# Altium PCB PCB1.PcbDoc
Units mil, origin at the board's own origin, x right, y up, seen from the top; angles counter-clockwise.
Board outline 1700 x 740 mil, 2 copper layers (Top Layer, Bottom Layer); 23 components, 43 nets, 151 pads, 22 vias.
Unrouted connection lines stored in the file: 26.
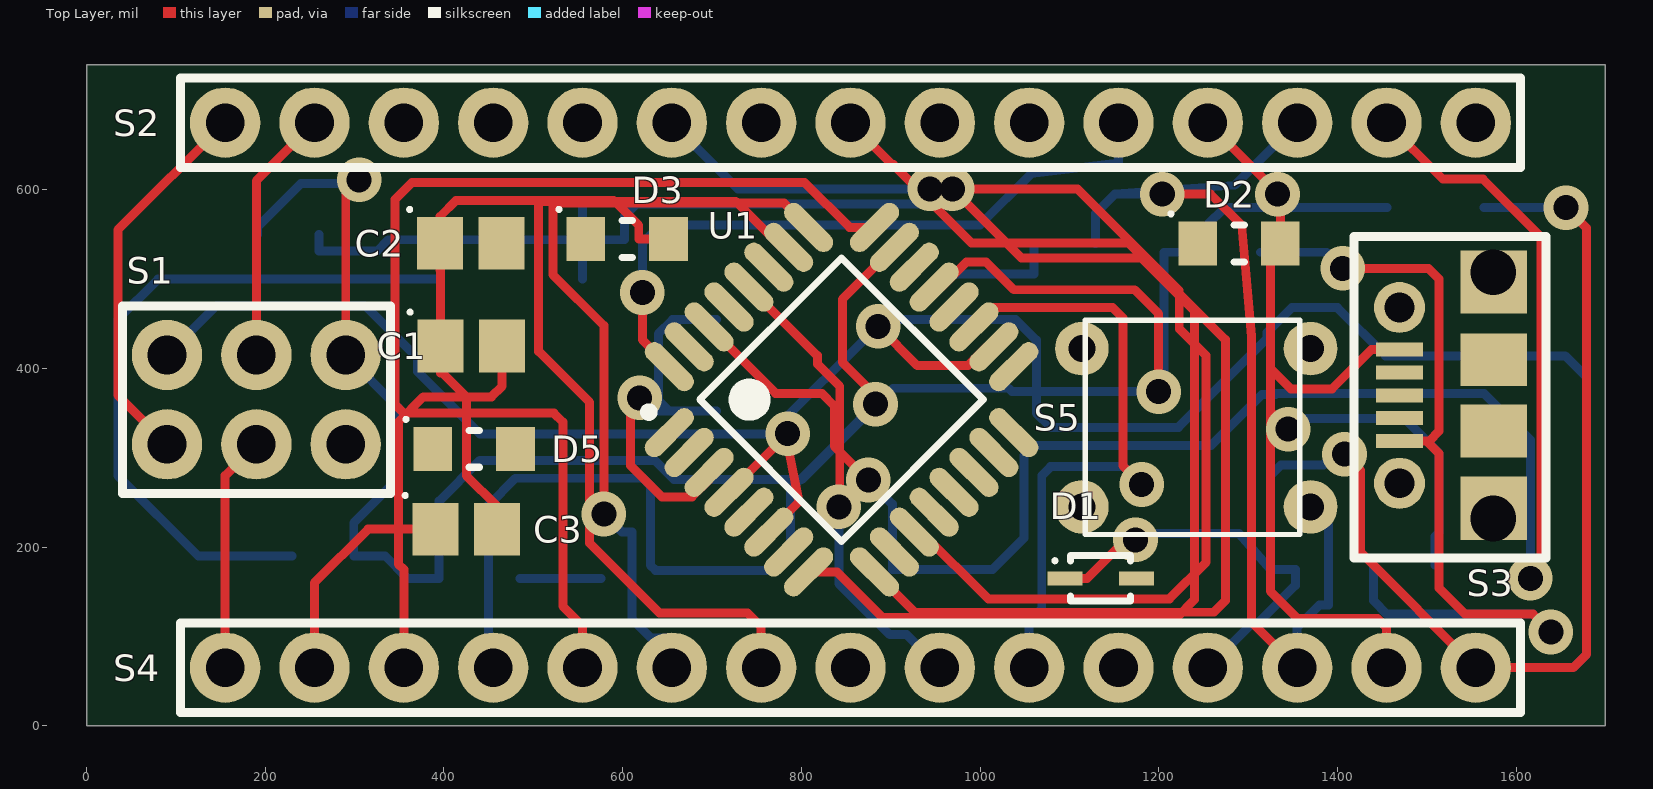
[diagram p0: Top Layer view]
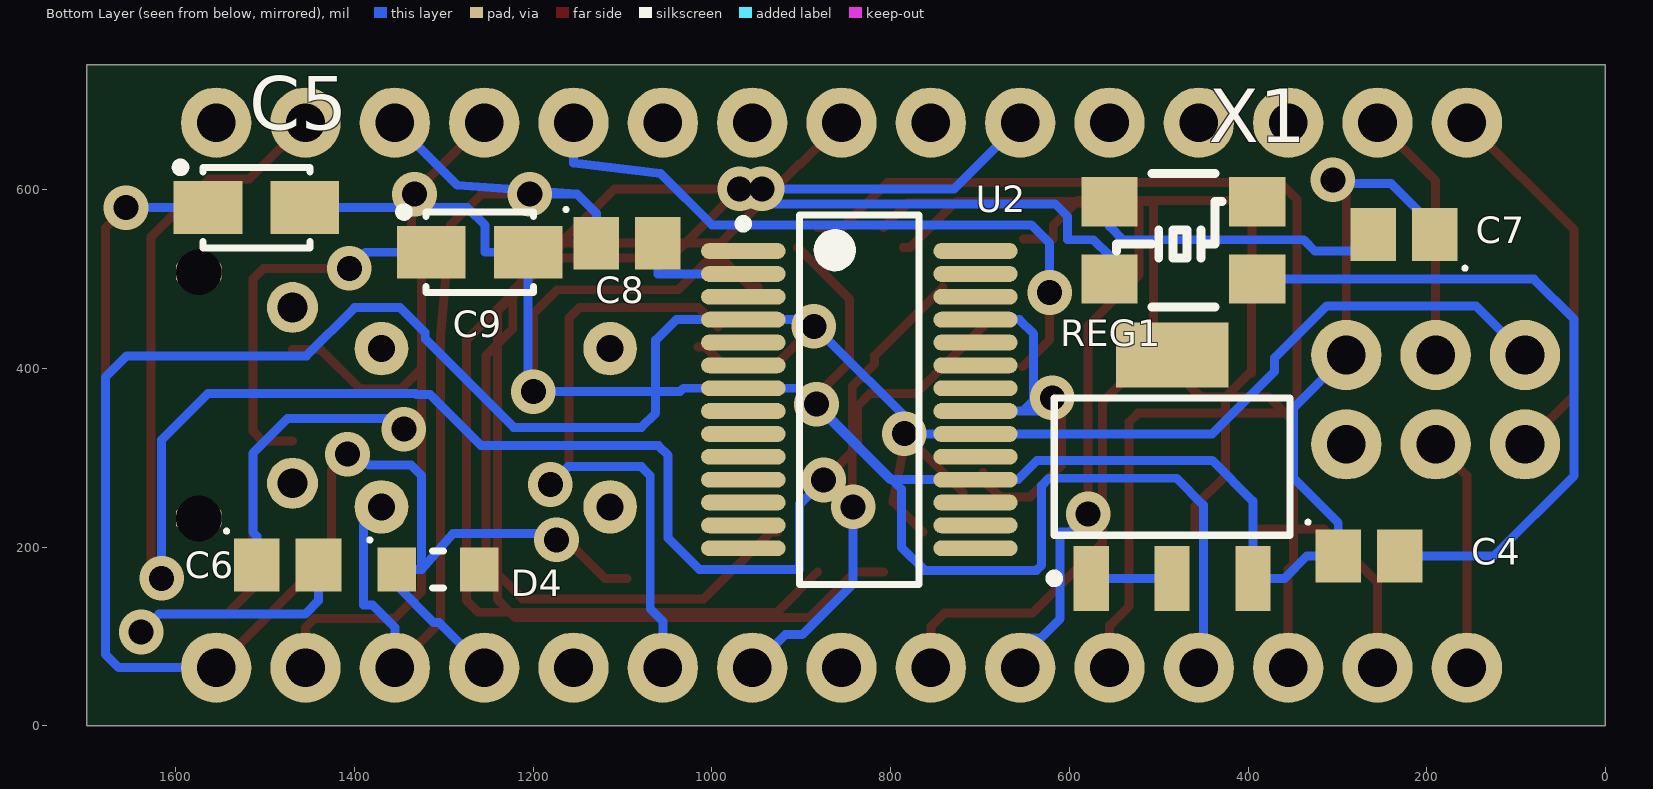
[diagram p1: Bottom Layer view, seen from below]

## Layer stack, top to bottom
Top Solder: solder mask 0.4, Solder Resist, Dk 3.5
Top Layer: signal copper 1.4
Dielectric 1: dielectric 12.6, FR-4, Dk 4.8
Bottom Layer: signal copper 1.4
Bottom Solder: solder mask 0.4, Solder Resist, Dk 3.5

## Board outline
0,0 0,740 1700,740 1700,0

## Design rules (kind name [scope] priority, off if disabled: settings)
Clearance [All] p1: gap=10 ignorepadtopadclearanceinfootprint=FALSE
PolygonConnect [All] p1: connectstyle=Relief reliefconductorwidth=10 reliefentries=4 polygonreliefangle="90 Angle" airgapwidth=10
RoutingVias [All] p1: holewidth=28 width=50 viastyle="Through Hole" minholewidth=28 minwidth=50 maxholewidth=28 maxwidth=50
SolderMaskExpansion [All] p1: expansion=4 istentingtop=FALSE
SupplyNets "Schematic Supply Nets_3" [InNet('VUSB')] p1: voltage=0.000
SupplyNets "Schematic Supply Nets_2" [InNet('AVCC')] p2: voltage=0.000
SupplyNets "Schematic Supply Nets_1" [InNet('3V')] p3: voltage=0.000
SupplyNets "Schematic Supply Nets" [InNet('GND')] p4: voltage=0.000
Width [All] p1: maxlimit=10 minlimit=10 preferedwidth=10
30 further rules are at their usual default settings.

## Components (designator, comment, footprint, x,y, rotation, side; value= is the part's Value field where it differs from the comment)
C1 "100nF Ceramic Multilayer Capacitor_1" CAPCP2012X09N 430.55,425 r0 top
C2 "100nF Ceramic Multilayer Capacitor_1" CAPCP2012X09N 430,540 r0 top
C3 "100nF Ceramic Multilayer Capacitor_1" CAPCP2012X09N 425,220 r0 top
C4 "C0805C180J5GACTU" CAPCP2012X09N 264.52,190 r180 bottom
C5 "Capacitor SMT Tantalum" "CASE A - 3216X18" 1510,580 r180 bottom value=4.7µF
C6 "100nF Ceramic Multilayer Capacitor_1" CAPCP2012X09N 1475,180 r180 bottom
C7 "C0805C180J5GACTU" CAPCP2012X09N 225.48,550 r0 bottom
C8 "100nF Ceramic Multilayer Capacitor_1" CAPCP2012X09N 1095.07,540 r180 bottom
C9 "Capacitor SMT Tantalum" "CASE A - 3216X18" 1260,530 r180 bottom value=4.7µF
D1 "Panasonic DB2J20900L Schottky Diode, 0.5A, 20V, 2.4ns, 2-Pin SMini2 F5 B" DIOM1712X07N 1135,165 r0 top
D2 "Kingbright Red LED, 100 mcd 120 ° 0805" LED1913X12NRED 1290,540 r0 top
D3 "Kingbright Blue LED, 60 mcd 120 ° 0805" LED1913X12NBLUE 605,545 r0 top
D4 "Kingbright Green LED, 70 mcd 120 ° 0805" LED1913X12NGREEN 1306.71,175 r180 bottom
D5 "Kingbright Red LED, 100 mcd 120 ° 0805" LED1913X12NRED 433.74,310 r0 top
REG1 "LM1117MP-5.0/NOPB, Low Dropout Voltage Regulator, 1.5A, 5 V ±1%, 4-Pin SOT-223" SOT230P700X180-4N 485,290 r90 bottom
S1 "Programming Headers Dual Row" "ISP HEADER" -605,870 r0 top
S2 "connector;str header;single row;.1 cont centers;.095 tail;gold or gtx;36 contact" Header 1555,675 r180 top
S3 "NewMolex Right Angle SMT Female Type B Micro USB Connector, 30 V ac, 1.8A" MicroUSB 1469.57,321.42 r90 top
S4 "connector;str header;single row;.1 cont centers;.095 tail;gold or gtx;36 contact" Header 1555,65 r180 top
S5 "Tactile Switch SPST- NO 0.05A @24V" "Tactile Switch" 1370,245 r0 top
U1 "ATMEGA328P-AU" TQFP80P900X900X120-32N 845,365 r45 top
U2 "FT232RL, Universal Asynchronous Receiver & Transmitter 3MBd, 28-Pin, SSOP" SOP65P780X200-28N 835,365 r180 bottom
X1 "Aker 16MHz Crystal SMT" "Aker S5C Crystal" 389.65,586.61 r180 bottom value=16MHz

## Footprints (in the part's own frame and the unit in brackets; to place one, negate y for a bottom-side part, rotate by r counter-clockwise, add the part's x,y. Pads: shape width x height; smd on the part's side, far side on the other; paste and mask are expansions set on the pad)
"Aker S5C Crystal" [mm]
  rect 1.6x1.4 smd: 1(0,0) 2(-4.2,0) 3(0,-2.2) 4(-4.2,-2.2)
  round 0.254 on Bottom Overlay: 5(-3,-2.4)
  silkscreen extent -4,-3 -1,0.8, body extent -4.7,-2.8 0.5,0.6, height 1
CAPCP2012X09N [mm] "Chip Capacitor, 2-Leads, Body 2.00x1.25mm, IPC Medium Density"
  rect 1.3x1.5 smd: 1(-0.875,0) 2(0.875,0)
  silkscreen extent -1.79,0.91 -1.69,1.01, body extent -1.05,-0.57 0.95,0.68, height 0.78
"CASE A - 3216X18" [mm] "Molded Capacitor, 2-Leads, Body 3.2x1.6mm, IPC Medium Density"
  rect 1.95x1.5 smd: 1(-1.375,0) 2(1.375,0)
  silkscreen extent -2.28,-1.14 1.52,1.27, body extent -1.52,-0.76 1.65,0.84, height 1.77
DIOM1712X07N [mm] "Molded Diode, 2-Leads, Body 1.70x1.25mm, IPC Medium Density"
  rect 1x0.4 smd: 1(-1.016,0) 2(1.016,0)
  silkscreen extent -1.35,-0.65 0.85,0.65, body extent -0.9,-0.45 0.9,0.45, height 0.8
Header [mm] "SIL Header"
  round 2 hole 1.1: 1(0,0) 2(2.54,0) 3(5.08,0) 4(7.62,0) 5(10.16,0) 6(12.7,0) 7(15.24,0) 8(17.78,0) 9(20.32,0) 10(22.86,0) 11(25.4,0) 12(27.94,0) 13(30.48,0) 14(33.02,0) 15(35.56,0)
  silkscreen extent -1.27,-1.27 36.83,1.27, body extent -1.33,-1.35 36.93,1.35, height 8.6
"ISP HEADER" [mm] "SIL Header for programming"
  round 2 hole 1.1: 1(17.653,-14.097) 2(17.653,-11.557) 3(20.193,-14.097) 4(20.193,-11.557) 5(22.733,-14.097) 6(22.733,-11.557)
  silkscreen extent 16.38,-15.49 24,-10.16, body extent 16.38,-15.37 24,-10.29, height 8
LED1913X12NBLUE [mm] "LED 2-Leads, Body 1.90x1.32mm, IPC Medium Density"
  rect 1.1x1.25 smd: 1(-1.175,0) 2(1.175,0)
  silkscreen extent -1.99,-0.53 0.15,0.89, body extent -1,-0.62 1.02,0.62, height 1.1
LED1913X12NGREEN [mm] "LED 2-Leads, Body 1.90x1.32mm, IPC Medium Density"
  rect 1.1x1.25 smd: 1(-1.175,0) 2(1.175,0)
  silkscreen extent -1.99,-0.53 0.15,0.89, body extent -1.01,-0.62 1.01,0.63, height 1.1
LED1913X12NRED [mm] "LED 2-Leads, Body 1.90x1.32mm, IPC Medium Density"
  rect 1.1x1.25 smd: 1(-1.175,0) 2(1.175,0)
  silkscreen extent -1.99,-0.53 0.15,0.89, body extent -1.02,-0.43 1.04,0.47, height 0.85
MicroUSB [mm] "MicroUSB  Molex 5Pin"
  rect 0.4x1.35 smd: 1(-0.07,0) 2(0.58,0) 3(1.23,0) 4(1.88,0) 5(2.53,0)
  rrect50% 0.6x1.3 hole 1.3: ""(-2.27,-2.667) ""(-2.27,-2.667) ""(4.73,-2.667)
  rect 1.8x1.9 smd: ""(-1.98,-2.678) ""(4.45,-2.678)
  round 1.45 hole 0.85: ""(-1.27,0) ""(3.73,0)
  rect 1.5x1.9 smd: ""(0.218,-2.678) ""(2.242,-2.678)
  silkscreen extent -3.39,-4.17 5.75,1.3, body extent -2.83,-5.32 5.37,0.11, height 2.68
SOP65P780X200-28N [mm] "SOP, 28-Leads, Body 10.20x5.30mm, Pitch 0.65mm, IPC Medium Density"
  oval 2.4x0.45 smd: 1(-3.3,4.225) 2(-3.3,3.575) 3(-3.3,2.925) 4(-3.3,2.275) 5(-3.3,1.625) 6(-3.3,0.975) 7(-3.3,0.325) 8(-3.3,-0.325) 9(-3.3,-0.975) 10(-3.3,-1.625) 11(-3.3,-2.275) 12(-3.3,-2.925) 13(-3.3,-3.575) 14(-3.3,-4.225) 15(3.3,-4.225) 16(3.3,-3.575) 17(3.3,-2.925) 18(3.3,-2.275) 19(3.3,-1.625) 20(3.3,-0.975) 21(3.3,-0.325) 22(3.3,0.325) 23(3.3,0.975) 24(3.3,1.625) 25(3.3,2.275) 26(3.3,2.925) 27(3.3,3.575) 28(3.3,4.225)
  silkscreen extent -3.43,-5.25 1.7,5.25, body extent -3.91,-5.1 3.91,5.1, height 2
SOT230P700X180-4N [mm] "SOT223, 4-Leads, Body 6.50x7.00mm (avg), Pitch 2.30mm, IPC Medium Density"
  rect 1.85x1 smd: 1(-3.175,2.3) 2(-3.175,0) 3(-3.175,-2.3)
  rect 1.85x3.2 smd: 4(3.175,0)
  silkscreen extent -3.3,-3.35 1.95,3.48, body extent -3.8,-3.12 3.29,3.38, height 1.65
"Tactile Switch" [mil]
  round 60 hole 30: 1(0,0) 2(-255.91,0) 3(0,177.17) 4(-255.91,177.17)
  silkscreen extent -252,-31 -12,209, body extent -277,-29 27,209, height 197
TQFP80P900X900X120-32N [mm] "TQFP, 32-Leads, Body 7.00x7.00mm, Pitch 0.80mm, IPC Medium Density"
  oval 1.75x0.55 smd: 1(-4.125,2.8) 2(-4.125,2) 3(-4.125,1.2) 4(-4.125,0.4) 5(-4.125,-0.4) 6(-4.125,-1.2) 7(-4.125,-2) 8(-4.125,-2.8) 17(4.125,-2.8) 18(4.125,-2) 19(4.125,-1.2) 20(4.125,-0.4) 21(4.125,0.4) 22(4.125,1.2) 23(4.125,2) 24(4.125,2.8)
  oval 0.55x1.75 smd: 9(-2.8,-4.125) 10(-2,-4.125) 11(-1.2,-4.125) 12(-0.4,-4.125) 13(0.4,-4.125) 14(1.2,-4.125) 15(2,-4.125) 16(2.8,-4.125) 25(2.8,4.125) 26(2,4.125) 27(1.2,4.125) 28(0.4,4.125) 29(-0.4,4.125) 30(-1.2,4.125) 31(-2,4.125) 32(-2.8,4.125)
  silkscreen extent -4.25,-2.85 2.85,3.75, body extent -4.44,-4.5 4.56,4.5, height 1.6

## Part data
C1 C2 C3 C6 C8: "AVX 0805 Standard 100nF Ceramic Multilayer Capacitor, 50 V dc X7R Dielectric ±10% SMD", Capacitance=100nF, Manufacturer=AVX, Package=0805, Voltage=50V, Creator="Ritesh Kanjee", Datasheet URL=http://za.rs-online.com/web/p/ceramic-multilayer-capacitors/4646688/, Date Created="18 February 2015", RS Stock No.=464-6688
C4 C7: library part "18pF Ceramic Multilayer Capacitor, 50 V dc C0G Dielectric ±5% SMD", "18pF Ceramic Multilayer Capacitor, 50 V dc C0G Dielectric ±5% SMD", Capacitance=18pF, Manufacturer=Kemet, Package=0805, Voltage=50V, Creator="Ritesh Kanjee", Datasheet URL=http://za.rs-online.com/web/p/ceramic-multilayer-capacitors/6480935/?searchTerm=C0805C180J5GACTU&relevancy-data=636F3D3226696E3D4931384E4B6E6F776E41734D504E266C753D656E266D6D3D6D61746368616C6C7061727469616C26706D3D5E5B5C707B4C7D5C707B4E647D2D2C2F255C2E5D2B2426706F3D313326736E3D592673743D4D414E5F504152545F4E554D4245522677633D424F5448267573743D4330383035433138304A35474143545526, Date Created="18 February 2015", RS Stock No.=648-0935
C5 C9: library part "4.7µF Tant RS 496-3545", "Capacitor,tantalum,SMT,16V,4.7uF,10%,A-case", Package=3216-18, Tolerance=10%, Voltage=16V, ComponentLink1Description="Supplier Website", ComponentLink1URL=http://za.rs-online.com/web/search/searchBrowseAction.html?method=getProduct&R=4963545, ComponentLink2Description="RS Data sheet", ComponentLink2URL=http://docs-europe.origin.electrocomponents.com/webdocs/04ed/0900766b804ed4cc.pdf, LatestRevisionDate=28-April-2010, Part Originator="H Theron", Publisher=DPSS, RS Stock Nr.=496-3545
D1: library part "Schottky Diode, 0.5A, 20V, 2.4ns, 2-Pin SMini2 F5 B", Manufacturer=Panasonic, Manufacturer Part No.=DB2J20900L, Maximum Continuous Forward Current=0.5A, Peak Reverse Repetitive Voltage=20V, Created By="R Kanjee", Datasheet=http://docs-europe.electrocomponents.com/webdocs/1398/0900766b813986b3.pdf, Date Created="1 March 2015", RS Stock No.=713-2703
D2 D5: Color=RED, Forward Voltage=1.85V, Manufacturer=KingBright, Manufacturer Part No.=KP-2012SRC-PRV, Creator="Ritesh Kanjee", Datasheet URL=http://za.rs-online.com/web/p/visible-leds/4663813/, Date Created="18 February 2015", RS Stock No.=466-3813
D3: Color=Blue, Forward Voltage=3.2V, Manufacturer=KingBright, Manufacturer Part No.=KP-2012PBC-A, Creator="Ritesh Kanjee", Datasheet URL=http://za.rs-online.com/web/p/visible-leds/4663784/, Date Created="18 February 2015", RS Stock No.=466-3784
D4: Color=Green, Forward Voltage="2.1 V", Manufacturer=KingBright, Manufacturer Part No.=KP-2012MGC, Creator="Ritesh Kanjee", Datasheet URL=http://za.rs-online.com/web/p/visible-leds/4663778/, Date Created="18 February 2015", RS Stock No.=466-3778
REG1: library part LM1117MP-5.0, Manufacturer="Texas Instruments", Maximum Input Voltage=15V, Output Voltage=5V, Supply Current=1.5Amps, Created By="R Kanjee", Datasheet URL=http://za.rs-online.com/web/p/low-dropout-voltage-regulators/5339583/, Date Created="26 February 2015", RS Stock No.=533-9583
S1: library part "Programming ISP, Programming Headers Dual Row", Current Rating="3Amps Continuous", Manufacturer=FCI, Manufacturer Part No.=68000-236HLF, Created By="R Kanjee", Date Created="1 March 2015", RS Stock No.=2509565626
S2 S4: library part "Single row; PCB headers", Current Rating="3Amps Continuous", Manufacturer=FCI, Manufacturer Part No.=68000-236HLF, Created By="R Kanjee", Date Created="1 March 2015", RS Stock No.=2509565626
S3: library part "Micro USB Connector, 30 V ac, 1.8A", Manufacturer=Molex, Manufacturer Part No.=105017-0001, Max Current=1.8A, Max Voltage=30V, Creator="R Kanjee", Datasheet URL=http://za.rs-online.com/web/p/micro-usb-connectors/8486764/, Date Created="28 February 2015", RS Stock No=848-6764
S5: Manufacturer=Omron, Manufacturer Part No.=B3F1000, Creator="R Kanjee", Date Created="25 February 2015", RS Stock No.=686-6847, State="Normaly Open"
U1: "ATMEGA328P-AU, 8 bit AVR Microcontroller 20MHz 1 kB, 32 kB Flash, 2 kB RAM, I2C 32-Pin TQFP", Company="Lumina Inova", Created By="Ritesh Kanjee", Datasheet URL=http://docs-europe.electrocomponents.com/webdocs/0db4/0900766b80db4deb.pdf, Date Created="14 February 2015", RS Stock No.=696-3092
U2: library part "FT232RL USB to UART, Universal Asynchronous Receiver & Transmitter 3MBd, 28-Pin, SSOP", Manufacturer="FTDI Chip", Manufacturer Part No.=FT232RL, Creator="R Kanjee", Date Created="03 March 2015", Pin Count=28, RS Stock No.=406-580
X1: library part "Aker  C5S-16.000-12-3030-X", "Aker S5C SMT Crystal", Frequency Stability=+/-30ppm, Load Capacitance=12pF, Manufacturer=Aker, Manufacturer Part #=C5S-16.000-12-3030-X, Package="3.2x5mm SMD", Creator="R Kanjee", HelpURL=http://za.rs-online.com/web/p/crystal-units/6719488/, RS="RS 671-9488", RS Stock Nr.=671-9488, Supplier=RS

## Via types
v1: diameter 50, hole 28, Top Layer to Bottom Layer, 22 vias

## Nets (pads, with @x,y where several pads share a name; then routed paths per layer and width w, separated by ;. In a path a pad name is that pad's centre, name@x,y a point inside that pad or via, vN(x,y) a via of type N, cw(c..) or ccw(c..) an arc to the next point about the centre after c; other vN are vias at no path point)
3V: C3.1 S4.14 U2.17 | length 255.4
  Top Layer w10: S4.14 255,160 315,220 C3.1
A0: S4.12 U1.23 | length 1054.3
  Top Layer w10: v1(883,360) 883,370 846,407 846,477.35 U1.23
  Bottom Layer w10: S4.12 450,70 450,247 480,277 622.83,277 631,268.83 631,179.86 636.86,174 762,174 788,200 788,265 v1(883,360)
A1: S4.11 U1.24 | length 1275
  Top Layer w10: S4.11 555,112 533,134 533,340 523,350 355,350 345,360 345,589 364,608 803.78,608 854,557.78 U1.24
A2: S4.10 U1.25 | length 890.6
  Top Layer w10: v1(579,237) 579,448 522,505 522,582 525,585 780.9,585 U1.25
  Bottom Layer w10: v1(579,237) 599,217 610.24,217 610.24,120 632.24,98 655,98 S4.10
A3: S4.9 U1.26 | length 984.1
  Top Layer w10: S4.9 755,111 740,126 641.29,126 563.02,204.27 563.02,361.98 506,419 506,587 726.34,587 777.83,535.51 U1.26
"A4 / SDA": S4.8 U1.27
"A5 SCL": S4.7 U1.28 | length 526.4
  Top Layer w10: U1.28 818,414.27 818,405 843,380 843,246 v1(842,245)
  Bottom Layer w10: v1(842,245) 842,159 899,102 918,102 S4.7
A6: S4.6 U1.19 | length 720.8
  Top Layer w10: U1.19 1014.81,468 1148.51,468 1160,456.51 1160,291 v1(1181,270)
  Bottom Layer w10: S4.6 1055,116.91 1069.09,131 1069.09,280 1079.09,290 1161,290 v1(1181,270)
A7: S4.5 U1.22
AREF: C1.2 S4.13 U1.20 | length 455.1
  Top Layer w10: S4.13 355,175 349,181 349,340 377,368 453,368 465,380 C1.2
AVCC: C2.2 C5.1 D1.1 D4.1 D5.1 REG1.1 REG1.2 S1.2 S4.1 S4.4 U1.4 U1.6 U1.18 U2.4 U2.20 | length 4549.8
  Top Layer w10: U1.4 v1(784.73,327) ; U1.6 797.38,250.57 v1@784.73,314.35 ; v1(886,447) 930,403 986.34,403 1007.5,424.16 U1.18 ; D1.1 1120,165 1163,208 v1(1174,208) ; v1(1408,304) 1426,286 1426,194 S4.1 1664,65 1679,80 1679,557 v1(1656,580)
  Bottom Layer w10: S1.2 145,470 311.89,470 370.39,411.51 370.39,396.23 440,326.61 U2.20 v1@764.9,326.61 ; REG1.2 REG1.1 ; v1@784.73,314.35 779.07,317.85 v1@764.9,326.61 ; v1(784.73,327) 780.61,326.61 v1@764.9,326.61 ; v1(886,447) v1@893.57,454.57 ; v1(1174,208) 1181,215 1290,215 1325,175 ; S4.4 1305.39,115.39 1311.34,115.39 1352.97,157.03 D4.1 1325,175 ; v1(1408,304) 1396.38,304 1384.38,292 1337,292 1325,280 1325,175 ; S4.1 1664,65 1679,80 1679,390 1655,414 1454,414 1400,468 1349,468 1321,440 1321,433 1222,334 1079,334 1063,350 1063,431.57 1040,454.57 U2.4 v1@893.57,454.57 ; C5.1 v1(1656,580) ; v1@764.9,326.61 885.64,447.36 v1@893.57,454.57
"D0 / RX": S2.2 U1.30 | length 2033.5
  Top Layer w10: U1.30 771.19,372 823,372 837.1,357.9 837.1,312.9 v1(875,275) ; S2.2 1518,612 1563,612 1628,547 1628,165 v1(1616,165)
  Bottom Layer w10: v1(875,275) 902,248 902,174.8 1013.8,174.8 1049.09,210.09 1049.09,302.69 1060,313.59 1258.47,313.59 1315.74,370.86 1330.72,370.86 1331.94,372.08 1563.92,372.08 1616,320 v1(1616,165)
"D1 / TX": S2.1 U1.31
D2: S2.5 U1.32 | length 761.7
  Top Layer w10: v1(622,485) 622,432.1 U1.32
  Bottom Layer w10: v1(622,485) 622,540 642.63,560.63 1000,560.63 1057.37,618 1155,630 S2.5
D3: S2.6 U1.1
D4: S2.7 U1.2
D5: S2.8 U1.9 | length 1229.4
  Top Layer w10: S2.8 902,628 903,628 990.72,540.28 1166.72,540.28 1274.69,432.31 1274.69,140 1261.69,127 927.1,127 U1.9
D6: S2.9 U1.10
D7: S2.10 U1.11 | length 1336.8
  Top Layer w10: U1.11 934.44,216.76 1009.2,142 1212,142 1253,183 1253,414.29 1223,444.29 1223,487 1109,601 v1(944,601)
  Bottom Layer w10: S2.10 729,601 v1(944,601)
D8: S2.11 U1.12
D9: S2.12 U1.13
D10: S2.13 U1.14
"D11  / MOSI": S1.4 S2.14 U1.15 | length 286.9
  Top Layer w10: S1.4 190,610 S2.14
"D12 / MISO": S1.1 S2.15 U1.16 | length 432.5
  Top Layer w10: S1.1 35,370 35,555 S2.15
"D13 / SCK": S1.3 S4.15 U1.17 | length 264.5
  Top Layer w10: S4.15 155,280 S1.3
GND: C1.1 C2.1 C3.2 C4.1 C5.2 C6.1 C7.1 C9.2 D2.2 D3.2 REG1.3 S1.6 S2.4 S3.5 S4.2 U1.3 U1.5 U1.21 U2.7 U2.18 U2.21 U2.25 | length 4938
  Top Layer w10: S1.6 290,596 v1(305,611) ; C3.2 459.45,245.55 425,280 425,368 398,395 396.1,395 C1.1 396.1,509.45 395.55,510 C2.1 395.55,570 413.55,588 590,588 618,560 618,545 D3.2 ; v1(619,367) 609,367 609,291.19 644,256.19 677.39,256.19 696.76,275.56 U1.3 ; U1.21 956.71,490.97 984.74,519 1007,519 1038,488 1173,488 1200,461 v1(1200,374) ; S2.4 1336.26,593.74 v1@1336.26,591.74 ; v1(1333,595) v1@1336.26,591.74 ; v1(1345,332) 1325,352 ; S4.2 1455,110 1445,120 1355.75,120 1325,150.75 1325,352 ; S3.5 1438.02,421.02 1394,377 1348,377 1325,400 ; 1325,352 1325,400 ; 1325,400 1325,540 D2.2 v1@1336.26,591.74
  Bottom Layer w10: C7.1 191.03,558.03 240,607 301,607 v1(305,611) ; S1.6 349,356 349,277.03 298.97,227 C4.1 334,190 359,165 REG1.3 394.45,251.45 440,297 636,297 657.57,275.43 U2.18 800.43,275.43 902.8,377.8 U2.7 1032.2,377.8 1036,374 v1(1200,374) 1206,380 C9.2@1206,530 ; v1(619,367) 633.8,352.2 652.36,352.2 ; U2.21 652.36,352.2 ; U2.25 656,454.57 640,438.57 640,364.57 652.36,352.2 ; C9.2 C9.2@1206,530 ; v1(1333,595) v1@1348,580 ; v1(1345,332) 1357,344 1475,344 1514,305 1514,216.55 1509.45,212 C6.1 ; C5.2 v1@1348,580 ; C9.2@1206,530 1253.97,530 1253.97,560 1273.97,580 v1@1348,580
NetC4_2: C4.2 X1.3 | length 780.6
  Bottom Layer w10: C4.2 125,190 35,280 35,455 80,500 X1.3
NetC7_2: C7.2 X1.2 | length 352.8
  Bottom Layer w10: C7.2 259.93,531.33 325,531.33 337.67,544 540,544 555,559 X1.2
NetC8_2: C8.2 U2.2 | length 130
  Bottom Layer w10: U2.2 1060.62,505.75 C8.2
NetD2_1: D2.1
NetD3_1: D3.1
NetD4_2: D4.2
NetD5_2: D5.2
NetR3_2: U2.23
NetR9_2: U2.22
NetS3_2: S3.2 U2.16
NetS3_3: S3.3 U2.15
RESET: C8.1 S1.5 S2.3 S4.3 S5.1 U1.29 | length 1179
  Top Layer w10: v1(1204,595) 1258,595 1293,560 1304,436 1304,116 S4.3
  Bottom Layer w10: C8.1 1129.52,573.52 1151,595 ; v1(1204,595) 1151,595 ; S4.3 1355,110 1380,135 1390,135 1390,225 S5.1 ; S2.3 1285,605 1203.71,598.93 1151,595
RX: U2.1
TX: U2.5
VUSB: C6.2 C9.1 D1.2 S3.1 | length 1000.1
  Top Layer w10: v1(1406,512) 1502,512 1514,500 1514,330 1502.66,318.66 1500,318.66 ; S3.1 1500,318.66 ; v1(1639,105) 1619,125 1543,125 1514,154 1514,304.66 1500,318.66
  Bottom Layer w10: C9.1 1388,530 v1(1406,512) ; C6.2 1440.55,140 1455.55,125 1619,125 v1(1639,105)
XTAL1: U1.7 X1.1
XTAL2: U1.8 X1.4 | length 1608.8
  Top Layer w10: U1.8 839.78,172.22 891,121 1220,121 1240,141 1240,464.65 1181.15,523.5 1046.5,523.5 v1(969,601)
  Bottom Layer w10: X1.4 555,526 573,544 602,544 602,570 616,584 969,584 v1(969,601)
pads on no net: REG1.4 S3. S3.4 S5.2 S5.3 S5.4 U2.3 U2.6 U2.8 U2.9 U2.10 U2.11 U2.12 U2.13 U2.14 U2.19 U2.24 U2.26 U2.27 U2.28 X1.5

## Silkscreen, mask and mechanical layers (free items; w line width, h text height)
Mechanical 1:
  the board outline again, w10